# Altium PCB TI1-1A-BASIS.PcbDoc
Units mm, origin at the board's own origin, x right, y up, seen from the top; angles counter-clockwise.
Board outline 52 x 138 mm, 2 copper layers (Top Layer, Bottom Layer), stack 1.57 mm thick; 42 components, 21 nets, 102 pads, 0 vias.
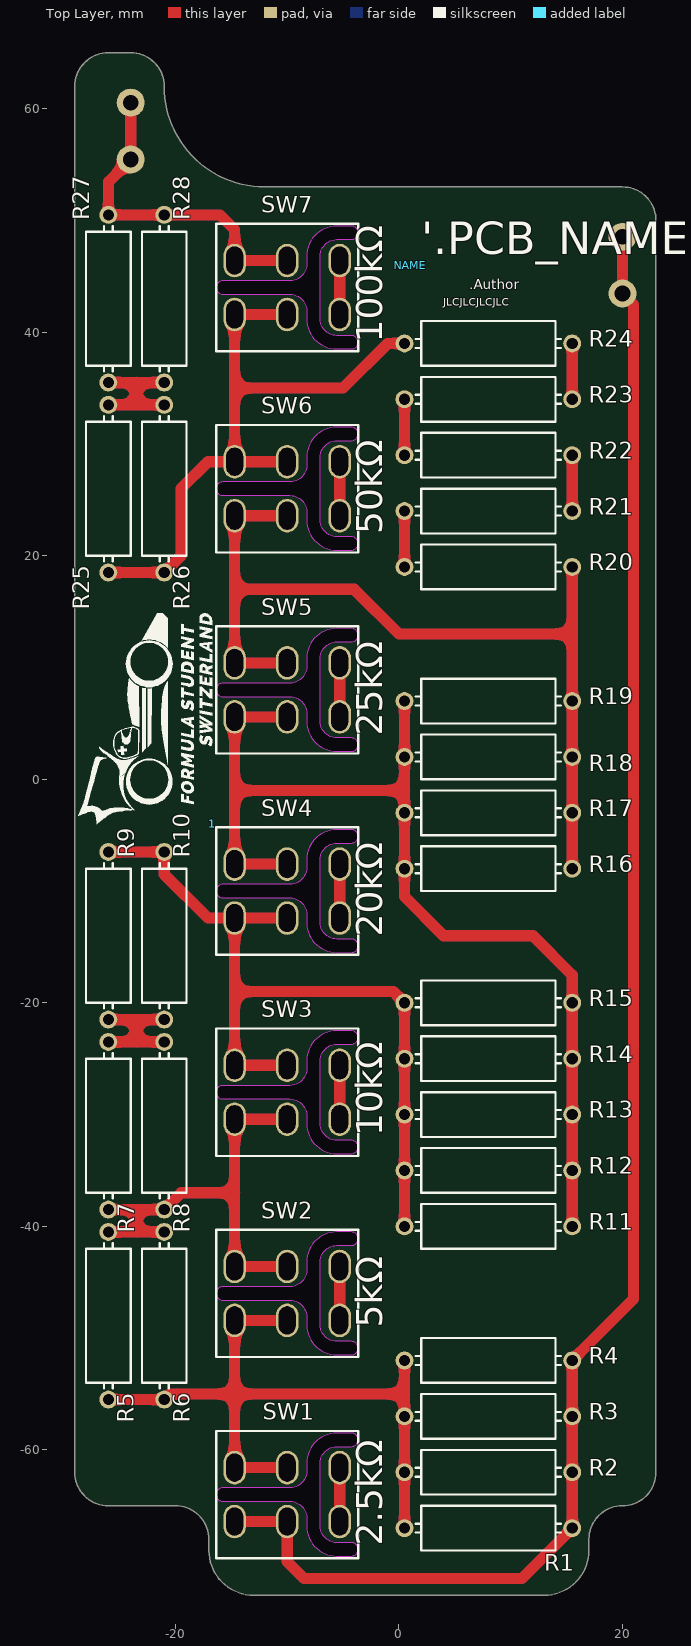
[diagram p0: Top Layer view]
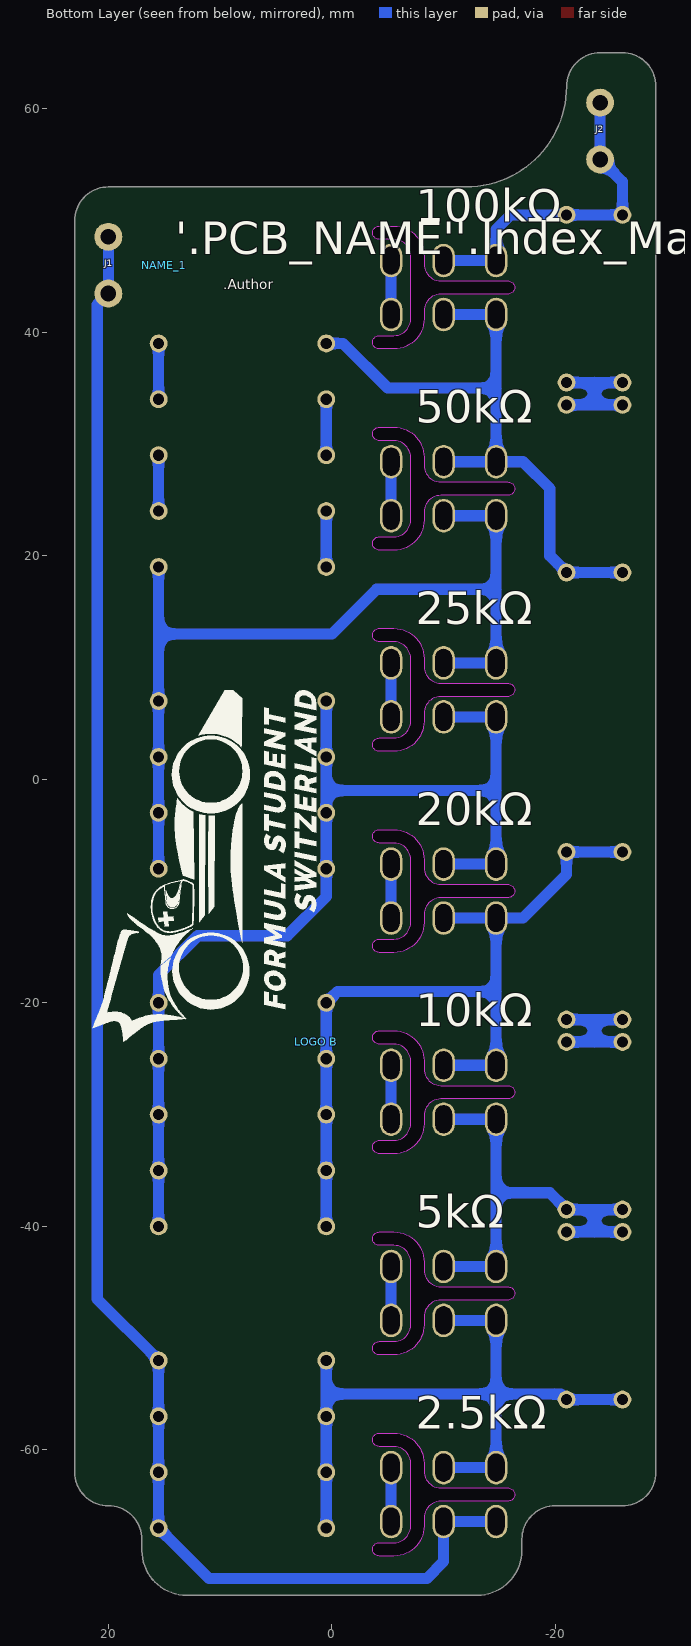
[diagram p1: Bottom Layer view, seen from below]

## Layer stack, top to bottom
Top Solder: solder mask 0.0102, Solder Resist, Dk 3.5
Top Layer: signal copper 0.035
Dielectric 1: dielectric 1.5, FR-4, Dk 4.8
Bottom Layer: signal copper 0.035
Bottom Solder: solder mask 0.0102, Solder Resist, Dk 3.5

## Board outline
-26,-65 -20,-65 cw(c-20,-68) -17,-68 -17,-69 ccw(c-13,-69) -13,-73 13,-73 ccw(c13,-69) 17,-69 17,-68 cw(c20,-68) 20,-65 ccw(c20,-62) 23,-62 23,50 ccw(c20,50) 20,53 -12,53 cw(c-12,62) -21,62 ccw(c-24,62) -24,65 -26,65 ccw(c-26,62) -29,62 -29,-62 ccw(c-26,-62)
cut-out: -15.75,-64.6 -9.75,-64.6 cw(c-9.75,-66.1) -8.25,-66.1 -8.25,-66.8 ccw(c-5.55,-66.8) -5.55,-69.5 -4.25,-69.5 ccw(c-4.25,-68.9) -3.65,-68.9 ccw(c-4.25,-68.9) -4.25,-68.3 -5.55,-68.3 cw(c-5.55,-66.8) -7.05,-66.8 -7.05,-61.2 cw(c-5.55,-61.2) -5.55,-59.7 -4.25,-59.7 ccw(c-4.25,-59.1) -3.65,-59.1 ccw(c-4.25,-59.1) -4.25,-58.5 -5.55,-58.5 ccw(c-5.55,-61.2) -8.25,-61.2 -8.25,-61.9 cw(c-9.75,-61.9) -9.75,-63.4 -15.75,-63.4 ccw(c-15.75,-64) -16.35,-64 ccw(c-15.75,-64)
cut-out: -15.75,-46.6 -9.75,-46.6 cw(c-9.75,-48.1) -8.25,-48.1 -8.25,-48.8 ccw(c-5.55,-48.8) -5.55,-51.5 -4.25,-51.5 ccw(c-4.25,-50.9) -3.65,-50.9 ccw(c-4.25,-50.9) -4.25,-50.3 -5.55,-50.3 cw(c-5.55,-48.8) -7.05,-48.8 -7.05,-43.2 cw(c-5.55,-43.2) -5.55,-41.7 -4.25,-41.7 ccw(c-4.25,-41.1) -3.65,-41.1 ccw(c-4.25,-41.1) -4.25,-40.5 -5.55,-40.5 ccw(c-5.55,-43.2) -8.25,-43.2 -8.25,-43.9 cw(c-9.75,-43.9) -9.75,-45.4 -15.75,-45.4 ccw(c-15.75,-46) -16.35,-46 ccw(c-15.75,-46)
cut-out: -15.75,-28.6 -9.75,-28.6 cw(c-9.75,-30.1) -8.25,-30.1 -8.25,-30.8 ccw(c-5.55,-30.8) -5.55,-33.5 -4.25,-33.5 ccw(c-4.25,-32.9) -3.65,-32.9 ccw(c-4.25,-32.9) -4.25,-32.3 -5.55,-32.3 cw(c-5.55,-30.8) -7.05,-30.8 -7.05,-25.2 cw(c-5.55,-25.2) -5.55,-23.7 -4.25,-23.7 ccw(c-4.25,-23.1) -3.65,-23.1 ccw(c-4.25,-23.1) -4.25,-22.5 -5.55,-22.5 ccw(c-5.55,-25.2) -8.25,-25.2 -8.25,-25.9 cw(c-9.75,-25.9) -9.75,-27.4 -15.75,-27.4 ccw(c-15.75,-28) -16.35,-28 ccw(c-15.75,-28)
cut-out: -15.75,-10.6 -9.75,-10.6 cw(c-9.75,-12.1) -8.25,-12.1 -8.25,-12.8 ccw(c-5.55,-12.8) -5.55,-15.5 -4.25,-15.5 ccw(c-4.25,-14.9) -3.65,-14.9 ccw(c-4.25,-14.9) -4.25,-14.3 -5.55,-14.3 cw(c-5.55,-12.8) -7.05,-12.8 -7.05,-7.2 cw(c-5.55,-7.2) -5.55,-5.7 -4.25,-5.7 ccw(c-4.25,-5.1) -3.65,-5.1 ccw(c-4.25,-5.1) -4.25,-4.5 -5.55,-4.5 ccw(c-5.55,-7.2) -8.25,-7.2 -8.25,-7.9 cw(c-9.75,-7.9) -9.75,-9.4 -15.75,-9.4 ccw(c-15.75,-10) -16.35,-10 ccw(c-15.75,-10)
cut-out: -15.75,7.4 -9.75,7.4 cw(c-9.75,5.9) -8.25,5.9 -8.25,5.2 ccw(c-5.55,5.2) -5.55,2.5 -4.25,2.5 ccw(c-4.25,3.1) -3.65,3.1 ccw(c-4.25,3.1) -4.25,3.7 -5.55,3.7 cw(c-5.55,5.2) -7.05,5.2 -7.05,10.8 cw(c-5.55,10.8) -5.55,12.3 -4.25,12.3 ccw(c-4.25,12.9) -3.65,12.9 ccw(c-4.25,12.9) -4.25,13.5 -5.55,13.5 ccw(c-5.55,10.8) -8.25,10.8 -8.25,10.1 cw(c-9.75,10.1) -9.75,8.6 -15.75,8.6 ccw(c-15.75,8) -16.35,8 ccw(c-15.75,8)
cut-out: -15.75,25.4 -9.75,25.4 cw(c-9.75,23.9) -8.25,23.9 -8.25,23.2 ccw(c-5.55,23.2) -5.55,20.5 -4.25,20.5 ccw(c-4.25,21.1) -3.65,21.1 ccw(c-4.25,21.1) -4.25,21.7 -5.55,21.7 cw(c-5.55,23.2) -7.05,23.2 -7.05,28.8 cw(c-5.55,28.8) -5.55,30.3 -4.25,30.3 ccw(c-4.25,30.9) -3.65,30.9 ccw(c-4.25,30.9) -4.25,31.5 -5.55,31.5 ccw(c-5.55,28.8) -8.25,28.8 -8.25,28.1 cw(c-9.75,28.1) -9.75,26.6 -15.75,26.6 ccw(c-15.75,26) -16.35,26 ccw(c-15.75,26)
cut-out: -15.75,43.4 -9.75,43.4 cw(c-9.75,41.9) -8.25,41.9 -8.25,41.2 ccw(c-5.55,41.2) -5.55,38.5 -4.25,38.5 ccw(c-4.25,39.1) -3.65,39.1 ccw(c-4.25,39.1) -4.25,39.7 -5.55,39.7 cw(c-5.55,41.2) -7.05,41.2 -7.05,46.8 cw(c-5.55,46.8) -5.55,48.3 -4.25,48.3 ccw(c-4.25,48.9) -3.65,48.9 ccw(c-4.25,48.9) -4.25,49.5 -5.55,49.5 ccw(c-5.55,46.8) -8.25,46.8 -8.25,46.1 cw(c-9.75,46.1) -9.75,44.6 -15.75,44.6 ccw(c-15.75,44) -16.35,44 ccw(c-15.75,44)
cut-out: -15.75,43.4 -9.75,43.4 cw(c-9.75,41.9) -8.25,41.9 -8.25,41.2 ccw(c-5.55,41.2) -5.55,38.5 -4.25,38.5 ccw(c-4.25,39.1) -3.65,39.1 ccw(c-4.25,39.1) -4.25,39.7 -5.55,39.7 cw(c-5.55,41.2) -7.05,41.2 -7.05,46.8 cw(c-5.55,46.8) -5.55,48.3 -4.25,48.3 ccw(c-4.25,48.9) -3.65,48.9 ccw(c-4.25,48.9) -4.25,49.5 -5.55,49.5 ccw(c-5.55,46.8) -8.25,46.8 -8.25,46.1 cw(c-9.75,46.1) -9.75,44.6 -15.75,44.6 ccw(c-15.75,44) -16.35,44 ccw(c-15.75,44)
cut-out: -15.75,25.4 -9.75,25.4 cw(c-9.75,23.9) -8.25,23.9 -8.25,23.2 ccw(c-5.55,23.2) -5.55,20.5 -4.25,20.5 ccw(c-4.25,21.1) -3.65,21.1 ccw(c-4.25,21.1) -4.25,21.7 -5.55,21.7 cw(c-5.55,23.2) -7.05,23.2 -7.05,28.8 cw(c-5.55,28.8) -5.55,30.3 -4.25,30.3 ccw(c-4.25,30.9) -3.65,30.9 ccw(c-4.25,30.9) -4.25,31.5 -5.55,31.5 ccw(c-5.55,28.8) -8.25,28.8 -8.25,28.1 cw(c-9.75,28.1) -9.75,26.6 -15.75,26.6 ccw(c-15.75,26) -16.35,26 ccw(c-15.75,26)
cut-out: -15.75,7.4 -9.75,7.4 cw(c-9.75,5.9) -8.25,5.9 -8.25,5.2 ccw(c-5.55,5.2) -5.55,2.5 -4.25,2.5 ccw(c-4.25,3.1) -3.65,3.1 ccw(c-4.25,3.1) -4.25,3.7 -5.55,3.7 cw(c-5.55,5.2) -7.05,5.2 -7.05,10.8 cw(c-5.55,10.8) -5.55,12.3 -4.25,12.3 ccw(c-4.25,12.9) -3.65,12.9 ccw(c-4.25,12.9) -4.25,13.5 -5.55,13.5 ccw(c-5.55,10.8) -8.25,10.8 -8.25,10.1 cw(c-9.75,10.1) -9.75,8.6 -15.75,8.6 ccw(c-15.75,8) -16.35,8 ccw(c-15.75,8)
cut-out: -15.75,-10.6 -9.75,-10.6 cw(c-9.75,-12.1) -8.25,-12.1 -8.25,-12.8 ccw(c-5.55,-12.8) -5.55,-15.5 -4.25,-15.5 ccw(c-4.25,-14.9) -3.65,-14.9 ccw(c-4.25,-14.9) -4.25,-14.3 -5.55,-14.3 cw(c-5.55,-12.8) -7.05,-12.8 -7.05,-7.2 cw(c-5.55,-7.2) -5.55,-5.7 -4.25,-5.7 ccw(c-4.25,-5.1) -3.65,-5.1 ccw(c-4.25,-5.1) -4.25,-4.5 -5.55,-4.5 ccw(c-5.55,-7.2) -8.25,-7.2 -8.25,-7.9 cw(c-9.75,-7.9) -9.75,-9.4 -15.75,-9.4 ccw(c-15.75,-10) -16.35,-10 ccw(c-15.75,-10)
cut-out: -15.75,-28.6 -9.75,-28.6 cw(c-9.75,-30.1) -8.25,-30.1 -8.25,-30.8 ccw(c-5.55,-30.8) -5.55,-33.5 -4.25,-33.5 ccw(c-4.25,-32.9) -3.65,-32.9 ccw(c-4.25,-32.9) -4.25,-32.3 -5.55,-32.3 cw(c-5.55,-30.8) -7.05,-30.8 -7.05,-25.2 cw(c-5.55,-25.2) -5.55,-23.7 -4.25,-23.7 ccw(c-4.25,-23.1) -3.65,-23.1 ccw(c-4.25,-23.1) -4.25,-22.5 -5.55,-22.5 ccw(c-5.55,-25.2) -8.25,-25.2 -8.25,-25.9 cw(c-9.75,-25.9) -9.75,-27.4 -15.75,-27.4 ccw(c-15.75,-28) -16.35,-28 ccw(c-15.75,-28)
cut-out: -15.75,-46.6 -9.75,-46.6 cw(c-9.75,-48.1) -8.25,-48.1 -8.25,-48.8 ccw(c-5.55,-48.8) -5.55,-51.5 -4.25,-51.5 ccw(c-4.25,-50.9) -3.65,-50.9 ccw(c-4.25,-50.9) -4.25,-50.3 -5.55,-50.3 cw(c-5.55,-48.8) -7.05,-48.8 -7.05,-43.2 cw(c-5.55,-43.2) -5.55,-41.7 -4.25,-41.7 ccw(c-4.25,-41.1) -3.65,-41.1 ccw(c-4.25,-41.1) -4.25,-40.5 -5.55,-40.5 ccw(c-5.55,-43.2) -8.25,-43.2 -8.25,-43.9 cw(c-9.75,-43.9) -9.75,-45.4 -15.75,-45.4 ccw(c-15.75,-46) -16.35,-46 ccw(c-15.75,-46)
cut-out: -15.75,-64.6 -9.75,-64.6 cw(c-9.75,-66.1) -8.25,-66.1 -8.25,-66.8 ccw(c-5.55,-66.8) -5.55,-69.5 -4.25,-69.5 ccw(c-4.25,-68.9) -3.65,-68.9 ccw(c-4.25,-68.9) -4.25,-68.3 -5.55,-68.3 cw(c-5.55,-66.8) -7.05,-66.8 -7.05,-61.2 cw(c-5.55,-61.2) -5.55,-59.7 -4.25,-59.7 ccw(c-4.25,-59.1) -3.65,-59.1 ccw(c-4.25,-59.1) -4.25,-58.5 -5.55,-58.5 ccw(c-5.55,-61.2) -8.25,-61.2 -8.25,-61.9 cw(c-9.75,-61.9) -9.75,-63.4 -15.75,-63.4 ccw(c-15.75,-64) -16.35,-64 ccw(c-15.75,-64)

## Design rules (kind name [scope] priority, off if disabled: settings)
BoardOutlineClearance [not (InComponent('MOUSE*'))] p1 off: gap=0.3 ignorepadtopadclearanceinfootprint=FALSE except(0: Arc-SplitContinuation Track-SplitContinuation SMDPad-SplitContinuation THPad-SplitContinuation Via-SplitContinuation Fill-SplitContinuation Poly-SplitContinuation Region-SplitContinuation Text-SplitContinuation)
Clearance Clearance_Cutout [IsBoardCutoutRegion] p1: gap=1 ignorepadtopadclearanceinfootprint=FALSE except(0: Arc-Hole Track-Hole SMDPad-Hole THPad-Hole Via-Hole Fill-Hole Poly-Hole Region-Hole Text-Hole; 0.2: THPad-Region)
Clearance Clearance_Switch [InComponent('SW*')] p2: gap=3 ignorepadtopadclearanceinfootprint=FALSE except(0: Arc-Hole Track-Hole SMDPad-Hole THPad-Hole Via-Hole Fill-Hole Poly-Hole Region-Hole Text-Hole; 1.199: THPad-THPad; 2.599: Arc-THPad Track-THPad)
Clearance [All] p3: gap=3 ignorepadtopadclearanceinfootprint=FALSE except(0: Arc-Hole Track-Hole SMDPad-Hole THPad-Hole Via-Hole Fill-Hole Poly-Hole Region-Hole Text-Hole)
ComponentClearance ComponentClearance_ESP-01S [All] p1: gap=0.254 collisioncheckmode=3 verticalgap=0.254 showdistances=FALSE
ComponentClearance ComponentClearance_Enclosure [isfree] p2: gap=0 collisioncheckmode=3 verticalgap=0 showdistances=FALSE
ComponentClearance [All] p3: gap=0.25 collisioncheckmode=3 verticalgap=0.25 showdistances=FALSE
Creepage [All] p1: checkdistance=3 applytopolygonpour=TRUE
DiffPairsRouting [InDifferentialPair('D') or InDifferentialPair('USB_D')] p1: maxlimit=0.15 minlimit=0.15 mostfreqgap=0.15 toplayer_minwidth=0.5 toplayer_maxwidth=0.5 toplayer_prefwidth=0.5 bottomlayer_minwidth=0.5 bottomlayer_maxwidth=0.5 bottomlayer_prefwidth=0.5 impedanceprofiledriven=TRUE impedanceprofileid={0B2F72EE-70D5-4F8D-B648-94B946845256} impedanceprofilevalue=90.000000 maxuncoupledlength=12.7
Height [All] p1: minheight=0 maxheight=100 prefheight=12.7
HoleSize [All] p1: absolutevalues=TRUE maxlimit=27 minlimit=0.3 maxpercent=80.000 minpercent=20.000
HoleToHoleClearance [All] p1: gap=0.3 allowstackedmicrovias=TRUE
MinimumSolderMaskSliver [All] p1: minsoldermaskwidth=0.095
PolygonConnect [All] p1: thpad.connectstyle=Relief thpad.reliefconductorwidth=0.2 thpad.reliefentries=4 thpad.polygonreliefangle="90 Angle" thpad.airgapwidth=0.2 smdpad.connectstyle=Relief smdpad.reliefconductorwidth=0.2 smdpad.reliefentries=4 smdpad.polygonreliefangle="90 Angle" smdpad.airgapwidth=0.2 via.connectstyle=Direct via.reliefconductorwidth=0.254 via.reliefentries=4 via.polygonreliefangle="90 Angle" via.airgapwidth=0.254
RoutingVias [All] p1: holewidth=0.35 width=0.7 viastyle="Through Hole" minholewidth=0.35 minwidth=0.7 maxholewidth=5 maxwidth=6
SilkToSilkClearance [All] p1: silktosilkclearance=0.1
SilkToSolderMaskClearance [IsPad] p1: minsilkscreentomaskgap=0.1 clearancetoexposedcopper=TRUE
SolderMaskExpansion "SolderMaskExpansion Via" [IsVia] p1: expansion=0.1 istentingtop=TRUE
SolderMaskExpansion [All] p2: expansion=0.05 istentingtop=FALSE
UnRoutedNet [All] p1: checkbadconnections=TRUE
Width [All] p1: maxlimit=5 minlimit=0.15 preferedwidth=0.3 minimp=50.000000 maximp=50.000000 favimp=50.000000
21 further rules are at their usual default settings.

## Classes and differential pairs
component class TI1-1-Top: J1 J2 R1 R2 R4 R6 R8 R10 R12 R14 R18 R19 R20 R22 R23 R24 R27 SW2 SW4 SW5 SW6 SW7

## Components (designator, comment, footprint, x,y, rotation, side; value= is the part's Value field where it differs from the comment)
1 "Comment" FSCH-LOGO-12MM -16.7,-4 r90 top
J1 "6.35mmx0.81mm Tab THT" Tab_THT_635 20,46 r90 bottom
J2 "6.35mmx0.81mm Tab THT" Tab_THT_635 -24,58 r270 bottom
"LOGO B" "Comment" FSCH-LOGO-20MM 1.4,-23.5 r90 bottom
NAME "Comment" PCB-NAME 1,46 r0 top
NAME_1 "Comment" PCB-NAME 15,46 r180 bottom
R1 "10K/1W/0414" RESAD1500W80L1200D400B 8,-67 r0 top value=10K
R2 "10K/1W/0414" RESAD1500W80L1200D400B 8,-62 r0 top value=10K
R3 "10K/1W/0414" RESAD1500W80L1200D400B 8,-57 r0 top value=10K
R4 "10K/1W/0414" RESAD1500W80L1200D400B 8,-52 r0 top value=10K
R5 "10K/1W/0414" RESAD1500W80L1200D400B -26,-48 r270 top value=10K
R6 "10K/1W/0414" RESAD1500W80L1200D400B -21,-48 r270 top value=10K
R7 "10K/1W/0414" RESAD1500W80L1200D400B -26,-31 r270 top value=10K
R8 "10K/1W/0414" RESAD1500W80L1200D400B -21,-31 r270 top value=10K
R9 "10K/1W/0414" RESAD1500W80L1200D400B -26,-14 r270 top value=10K
R10 "10K/1W/0414" RESAD1500W80L1200D400B -21,-14 r270 top value=10K
R11 "10K/1W/0414" RESAD1500W80L1200D400B 8,-40 r180 top value=10K
R12 "100K/1W/0414" RESAD1500W80L1200D400B 8,-35 r180 top value=100K
R13 "100K/1W/0414" RESAD1500W80L1200D400B 8,-30 r180 top value=100K
R14 "100K/1W/0414" RESAD1500W80L1200D400B 8,-25 r180 top value=100K
R15 "100K/1W/0414" RESAD1500W80L1200D400B 8,-20 r180 top value=100K
R16 "100K/1W/0414" RESAD1500W80L1200D400B 8,-8 r180 top value=100K
R17 "100K/1W/0414" RESAD1500W80L1200D400B 8,-3 r180 top value=100K
R18 "100K/1W/0414" RESAD1500W80L1200D400B 8,2 r180 top value=100K
R19 "100K/1W/0414" RESAD1500W80L1200D400B 8,7 r180 top value=100K
R20 "10K/1W/0414" RESAD1500W80L1200D400B 8,19 r0 top value=10K
R21 "10K/1W/0414" RESAD1500W80L1200D400B 8,24 r0 top value=10K
R22 "10K/1W/0414" RESAD1500W80L1200D400B 8,29 r0 top value=10K
R23 "10K/1W/0414" RESAD1500W80L1200D400B 8,34 r0 top value=10K
R24 "10K/1W/0414" RESAD1500W80L1200D400B 8,39 r0 top value=10K
R25 "100K/1W/0414" RESAD1500W80L1200D400B -26,26 r270 top value=100K
R26 "100K/1W/0414" RESAD1500W80L1200D400B -21,26 r270 top value=100K
R27 "100K/1W/0414" RESAD1500W80L1200D400B -26,43 r270 top value=100K
R28 "100K/1W/0414" RESAD1500W80L1200D400B -21,43 r270 top value=100K
SW1 "SW-DPDT" RND_DPDT_12.6mm_210-00450 -10,-64 r270 top
SW2 "SW-DPDT" RND_DPDT_12.6mm_210-00450 -10,-46 r270 top
SW3 "SW-DPDT" RND_DPDT_12.6mm_210-00450 -10,-28 r270 top
SW4 "SW-DPDT" RND_DPDT_12.6mm_210-00450 -10,-10 r270 top
SW5 "SW-DPDT" RND_DPDT_12.6mm_210-00450 -10,8 r270 top
SW6 "SW-DPDT" RND_DPDT_12.6mm_210-00450 -10,26 r270 top
SW7 "SW-DPDT" RND_DPDT_12.6mm_210-00450 -10,44 r270 top
? "Comment" JLC-ORDER 8,44 r0 top

## Footprints (in the part's own frame and the unit in brackets; to place one, negate y for a bottom-side part, rotate by r counter-clockwise, add the part's x,y. Pads: shape width x height; smd on the part's side, far side on the other; paste and mask are expansions set on the pad)
FSCH-LOGO-12MM [mm]
  silkscreen extent 0,0 18.85,11.99, body extent 0,0 18.85,11.99, height 0
FSCH-LOGO-20MM [mm]
  silkscreen extent 0,0 31.48,20.02, body extent 0,0 31.48,20.02, height 0.01
JLC-ORDER [mm] "Placement of JLCPCB order number"
PCB-NAME [mm]
RESAD1500W80L1200D400B [mm]
  round 1.6 hole 1: 1(-7.5,0) 2(7.5,0)
  silkscreen extent -6.5,-2 6.5,2, body extent -7.9,-2.01 7.9,2.01, height 4.01
RND_DPDT_12.6mm_210-00450 [mm]
  oval 3x2 hole 1.5 slot 2.5 at 0 deg: 1(-2.413,0) 2(-2.413,4.699) 3(-2.413,-4.699) 4(2.413,0) 5(2.413,4.699) 6(2.413,-4.699)
  silkscreen extent -5.7,-6.35 5.7,6.35, body extent -5.7,-6.35 5.7,6.35, height 24.45
Tab_THT_635 [mm]
  round 2.5 hole 1.4: 1(-2.54,0) 1(2.54,0)
  body extent -3.96,-1.54 3.96,1.54, height 10.21

## Part data
J1 J2: library part Tab_025_THT, "CONN QC TAB 0.250 SOLDER", Manufacturer=GENERIC, Manufacturer 1="TE Connectivity AMP Connectors", Manufacturer 3="TE Connectivity", Manufacturer Part Number 1=1217861-1, Supplier Part Number 1=A100452CT-ND, HelpURL=https://www.te.com/usa-en/product-1217861-1.datasheet.pdf, Manufacturer Part Number 3=1217861-1, Part Number=Tab_025_THT, Supplier 1=Digi-Key, Supplier 3=LCSC, Supplier Part Number 3=C428480
R1 R2 R3 R4 R5 R6 R7 R8 R9 R10 R11 R20 R21 R22 R23 R24: "RES TH 1W 0414 10K", Absolute Value=10000, Manufacturer=GENERIC, Manufacturer 1=Vishay, Manufacturer Part Number 1=MBE04140C1002FC100, Package=0414, Supplier Part Number 1=160-59-946, HelpURL=https://www.vishay.com/docs/28766/mbxsma.pdf, Part Number=10K/1W/0414, Supplier 1=Distrelec
R12 R13 R14 R15 R16 R17 R18 R19 R25 R26 R27 R28: "RES TH 1W 0414 100K", Absolute Value=100000, Manufacturer=GENERIC, Manufacturer 1=Vishay, Manufacturer Part Number 1=MBE04140C1003FC100, Package=0414, Supplier Part Number 1=160-59-946, HelpURL=https://www.vishay.com/docs/28766/mbxsma.pdf, Part Number=100K/1W/0414, Supplier 1=Distrelec
SW1 SW2 SW3 SW4 SW5 SW6 SW7: library part SW-DPDT-RND-210-00450, "Miniature Toggle Switch, ON-ON, DPDT, 2A, IP67", Manufacturer=RND, Manufacturer Part Number 1="RND 210-00450", Supplier Part Number 1=301-03-435, HelpURL=https://media.distrelec.com/Web/Downloads/_t/ds/RND_210-00450_eng_tds.pdf, Manufacturer 1=RND, Part Number=SW-DPDT-RND-210-00450, Supplier 1=Distrelec

## Nets (pads, with @x,y where several pads share a name; then routed paths per layer and width w, separated by ;. In a path a pad name is that pad's centre, name@x,y a point inside that pad or via, vN(x,y) a via of type N, cw(c..) or ccw(c..) an arc to the next point about the centre after c; other vN are vias at no path point)
NetJ1_1: J1.1 R1.2 R2.2 R3.2 R4.2 SW1.4 SW1.6 | length 309
  Top Layer w1: SW1.6 SW1.4 -10,-70 -8.5,-71.5 11,-71.5 15.385,-67.115 R1.2 R2.2 R3.2 R4.2 15.615,-51.885 21,-46.5 21,42.46 20,43.46 J1.1@20,48.54
  Bottom Layer w1: SW1.6 SW1.4 -10,-70 -8.5,-71.5 11,-71.5 15.385,-67.115 R1.2 R2.2 R3.2 R4.2 15.615,-51.885 21,-46.5 21,42.46 20,43.46 J1.1@20,48.54
NetJ2_1: J2.1 R27.1 R28.1 SW7.1 SW7.3 | length 60.4
  Top Layer w1: J2.1@-24,60.54 -24,55.46 -26,53.46 R27.1 R28.1 -16,50.5 -14.699,49.199 SW7.3 SW7.1
  Bottom Layer w1: J2.1@-24,60.54 -24,55.46 -26,53.46 R27.1 R28.1 -16,50.5 -14.699,49.199 SW7.3 SW7.1
NetR1_1: R1.1 R2.1 R3.1 R4.1 R5.2 R6.2 SW1.1 SW1.3 SW2.4 SW2.6 | length 128.6
  Top Layer w1: R5.2 R6.2 -20.5,-55 -14.699,-55 ; SW1.1 SW1.3 -14.699,-55 ; SW2.4 SW2.6 -14.699,-55 ; R1.1 R2.1 R3.1 0.5,-55 ; R4.1 0.5,-55 ; -14.699,-55 0.5,-55
  Bottom Layer w1: R5.2 R6.2 -20.5,-55 -14.699,-55 ; SW1.1 SW1.3 -14.699,-55 ; SW2.4 SW2.6 -14.699,-55 ; R1.1 R2.1 R3.1 0.5,-55 ; R4.1 0.5,-55 ; -14.699,-55 0.5,-55
NetR5_1: R5.1 R6.1 R7.2 R8.2 SW2.1 SW2.3 SW3.4 SW3.6 | length 83
  Top Layer w1: R5.1 -23.5,-40.5 ; R7.2 -23.5,-38.5 ; R6.1 -23.5,-40.5 ; SW2.1 SW2.3 -14.699,-37 ; SW3.4 SW3.6 -14.699,-37 ; -23.5,-40.5 -23.5,-38.5 ; -23.5,-38.5 R8.2 -19.5,-37 -14.699,-37
  Bottom Layer w1: R5.1 -23.5,-40.5 ; R7.2 -23.5,-38.5 ; R6.1 -23.5,-40.5 ; SW2.1 SW2.3 -14.699,-37 ; SW3.4 SW3.6 -14.699,-37 ; -23.5,-40.5 -23.5,-38.5 ; -23.5,-38.5 R8.2 -19.5,-37 -14.699,-37
NetR7_1: R7.1 R8.1 R9.2 R10.2 | length 24
  Top Layer w1: R7.1 -23.5,-23.5 ; R9.2 -23.5,-21.5 ; R8.1 -23.5,-23.5 ; R10.2 -23.5,-21.5 ; -23.5,-23.5 -23.5,-21.5
  Bottom Layer w1: R7.1 -23.5,-23.5 ; R9.2 -23.5,-21.5 ; R8.1 -23.5,-23.5 ; R10.2 -23.5,-21.5 ; -23.5,-23.5 -23.5,-21.5
NetR9_1: R9.1 R10.1 R11.2 R12.2 R13.2 R14.2 R15.2 SW3.1 SW3.3 SW4.4 SW4.6 | length 146.2
  Top Layer w1: R9.1 R10.1 -21,-8.5 -17.087,-12.413 SW4.6 ; SW3.1 SW3.3 -14.699,-19 ; SW4.4 SW4.6 ; R11.2 R12.2 R13.2 R14.2 R15.2 -0.5,-19 -14.699,-19 ; -14.699,-19 SW4.6
  Bottom Layer w1: R9.1 R10.1 -21,-8.5 -17.087,-12.413 SW4.6 ; SW3.1 SW3.3 -14.699,-19 ; SW4.4 SW4.6 ; R11.2 R12.2 R13.2 R14.2 R15.2 -0.5,-19 -14.699,-19 ; -14.699,-19 SW4.6
NetR11_1: R11.1 R12.1 R13.1 R14.1 R15.1 R16.2 R17.2 R18.2 R19.2 SW4.1 SW4.3 SW5.4 SW5.6 | length 191.3
  Top Layer w1: SW4.1 SW4.3 -14.699,-1 ; SW5.4 SW5.6 -14.699,-1 ; R19.2 R18.2 0.5,-1 ; R11.1 R12.1 R13.1 R14.1 R15.1 15.5,-17.5 12,-14 4,-14 0.5,-10.5 R16.2 R17.2 0.5,-1 ; -14.699,-1 0.5,-1
  Bottom Layer w1: SW4.1 SW4.3 -14.699,-1 ; SW5.4 SW5.6 -14.699,-1 ; R19.2 R18.2 0.5,-1 ; R11.1 R12.1 R13.1 R14.1 R15.1 15.5,-17.5 12,-14 4,-14 0.5,-10.5 R16.2 R17.2 0.5,-1 ; -14.699,-1 0.5,-1
NetR16_1: R16.1 R17.1 R18.1 R19.1 R20.2 SW5.1 SW5.3 SW6.4 SW6.6 | length 162.9
  Top Layer w1: SW5.1 SW5.3 -14.699,17 ; SW6.4 SW6.6 -14.699,17 ; R16.1 R17.1 R18.1 R19.1 15.5,13 ; R20.2 15.5,13 ; -14.699,17 -4,17 0,13 15.5,13
  Bottom Layer w1: SW5.1 SW5.3 -14.699,17 ; SW6.4 SW6.6 -14.699,17 ; R16.1 R17.1 R18.1 R19.1 15.5,13 ; R20.2 15.5,13 ; -14.699,17 -4,17 0,13 15.5,13
NetR20_1: R20.1 R21.1 | length 10
  Top Layer w1: R20.1 R21.1
  Bottom Layer w1: R20.1 R21.1
NetR21_2: R21.2 R22.2 | length 10
  Top Layer w1: R21.2 R22.2
  Bottom Layer w1: R21.2 R22.2
NetR22_1: R22.1 R23.1 | length 10
  Top Layer w1: R22.1 R23.1
  Bottom Layer w1: R22.1 R23.1
NetR23_2: R23.2 R24.2 | length 10
  Top Layer w1: R23.2 R24.2
  Bottom Layer w1: R23.2 R24.2
NetR24_1: R24.1 R25.2 R26.2 SW6.1 SW6.3 SW7.4 SW7.6 | length 116.7
  Top Layer w1: R25.2 R26.2 -19.5,20 -19.5,26 -17.087,28.413 SW6.3 ; SW6.1 SW6.3 ; SW7.4 SW7.6 -14.699,35 ; R24.1 -1,39 -5,35 -14.699,35 ; SW6.3 -14.699,35
  Bottom Layer w1: R25.2 R26.2 -19.5,20 -19.5,26 -17.087,28.413 SW6.3 ; SW6.1 SW6.3 ; SW7.4 SW7.6 -14.699,35 ; R24.1 -1,39 -5,35 -14.699,35 ; SW6.3 -14.699,35
NetR25_1: R25.1 R26.1 R27.2 R28.2 | length 24
  Top Layer w1: R25.1 -23.5,33.5 ; R27.2 -23.5,35.5 ; R26.1 -23.5,33.5 ; R28.2 -23.5,35.5 ; -23.5,33.5 -23.5,35.5
  Bottom Layer w1: R25.1 -23.5,33.5 ; R27.2 -23.5,35.5 ; R26.1 -23.5,33.5 ; R28.2 -23.5,35.5 ; -23.5,33.5 -23.5,35.5
NetSW1_2: SW1.2 SW1.5 | length 9.7
  Top Layer w1: SW1.5 SW1.2
  Bottom Layer w1: SW1.5 SW1.2
NetSW2_2: SW2.2 SW2.5 | length 9.7
  Top Layer w1: SW2.5 SW2.2
  Bottom Layer w1: SW2.5 SW2.2
NetSW3_2: SW3.2 SW3.5 | length 9.7
  Top Layer w1: SW3.5@-5.301,-30.3 SW3.2@-5.301,-25.474
  Bottom Layer w1: SW3.5@-5.301,-30.3 SW3.2@-5.301,-25.474
NetSW4_2: SW4.2 SW4.5 | length 9.7
  Top Layer w1: SW4.5 SW4.2
  Bottom Layer w1: SW4.5 SW4.2
NetSW5_2: SW5.2 SW5.5 | length 9.7
  Top Layer w1: SW5.5 SW5.2
  Bottom Layer w1: SW5.5 SW5.2
NetSW6_2: SW6.2 SW6.5 | length 9.7
  Top Layer w1: SW6.5 SW6.2
  Bottom Layer w1: SW6.5 SW6.2
NetSW7_2: SW7.2 SW7.5 | length 9.7
  Top Layer w1: SW7.5 SW7.2
  Bottom Layer w1: SW7.5 SW7.2

## Silkscreen, mask and mechanical layers (free items; w line width, h text height)
Top Overlay:
  text ".Author" at 6.275,43.528 h1.5
  text "100kΩ" at -0.719,39.054 h4 r90
  text "50kΩ" at -0.719,21.93 h4 r90
  text "25kΩ" at -0.719,3.904 h4 r90
  text "20kΩ" at -0.719,-14.096 h4 r90
  text "10kΩ" at -0.719,-31.95 h4 r90
  text "5kΩ" at -0.719,-49.074 h4 r90
  text "2.5kΩ" at -0.719,-68.594 h4 r90
Bottom Overlay:
  text "100kΩ" at -7.5,48.899 h5
  text ".Author" at 9.725,43.528 h1.5
  text "50kΩ" at -7.5,30.899 h5
  text "25kΩ" at -7.495,12.899 h5
  text "20kΩ" at -7.495,-5.101 h5
  text "10kΩ" at -7.5,-23.101 h5
  text "5kΩ" at -7.5,-41.101 h5
  text "2.5kΩ" at -7.495,-59.101 h5
Board:
  drawing of 165 lines, arcs and shapes, not listed
  text "CUTOUT" at -11.831,43.68 h1
  text "CUTOUT" at -11.831,25.68 h1
  text "CUTOUT" at -11.831,7.68 h1
  text "CUTOUT" at -11.831,-10.32 h1
  text "CUTOUT" at -11.831,-28.32 h1
  text "CUTOUT" at -11.831,-46.32 h1
  text "CUTOUT" at -11.831,-64.32 h1
Dimensions:
  lines w0.2: -40,-78 ccw(c-38,-78) -38,-80 37.997,-80 ccw(c37.997,-77.997) 40,-77.997 40,78 ccw(c38,78) 38,80 -38,80 ccw(c-38,78) -40,78 -40,-78
Panel Cutout:
  lines w0.2: -15,61.48 ccw(c-9.5,64) -4,61.48 -4,66.52 ccw(c-9.5,64) -15,66.52 -15,61.48 ; -10.96,-67 cw(c-10,-64) -10.96,-61 -9.04,-61 cw(c-10,-64) -9.04,-67 -10.96,-67 ; -10.96,-49 cw(c-10,-46) -10.96,-43 -9.04,-43 cw(c-10,-46) -9.04,-49 -10.96,-49 ; -10.96,-31 cw(c-10,-28) -10.96,-25 -9.04,-25 cw(c-10,-28) -9.04,-31 -10.96,-31 ; -10.96,-13 cw(c-10,-10) -10.96,-7 -9.04,-7 cw(c-10,-10) -9.04,-13 -10.96,-13 ; -10.96,5 cw(c-10,8) -10.96,11 -9.04,11 cw(c-10,8) -9.04,5 -10.96,5 ; -10.96,23 cw(c-10,26) -10.96,29 -9.04,29 cw(c-10,26) -9.04,23 -10.96,23 ; -10.96,41 cw(c-10,44) -10.96,47 -9.04,47 cw(c-10,44) -9.04,41 -10.96,41 ; 4,61.48 ccw(c9.5,64) 15,61.48 15,66.52 ccw(c9.5,64) 4,66.52 4,61.48
Top Assembly:
  circle w0.1: c-9.5,64 r6.05
  circle w0.1: c9.5,64 r6.05
  circle w0.1: c9.5,64 r8
  circle w0.1: c-9.5,64 r8
  lines w0.2: -40,-78 ccw(c-38,-78) -38,-80 37.997,-80 ccw(c37.997,-77.997) 40,-77.997 40,78 ccw(c38,78) 38,80 -38,80 ccw(c-38,78) -40,78 -40,-78 ; -36,-64.5 ccw(c-33,-64.5) -33,-67.5 -23,-67.5 cw(c-23,-72.5) -18,-72.5 -18,-73 ccw(c-15,-73) -15,-76 15,-76 ccw(c15,-73) 18,-73 18,-72.5 cw(c23,-72.5) 23,-67.5 33,-67.5 ccw(c33,-64.5) 36,-64.5 36,64.5 ccw(c33,64.5) 33,67.5 23,67.5 cw(c23,72.5) 18,72.5 18,73 ccw(c15,73) 15,76 -15,76 ccw(c-15,73) -18,73 -18,72.5 cw(c-23,72.5) -23,67.5 -33,67.5 ccw(c-33,64.5) -36,64.5 -36,-64.5

## Text inside footprints (layer, text, board x,y; h text height)
?: Top Overlay "JLCJLCJLCJLC" at 3.981,42.116 h1.2